# Altium PCB blm_ctrl.PcbDoc
Units mm, origin at the board's own origin, x right, y up, seen from the top; angles counter-clockwise.
Board outline 62 x 18 mm, 2 copper layers (Top Layer, Bottom Layer); 99 components, 64 nets, 249 pads, 43 vias.
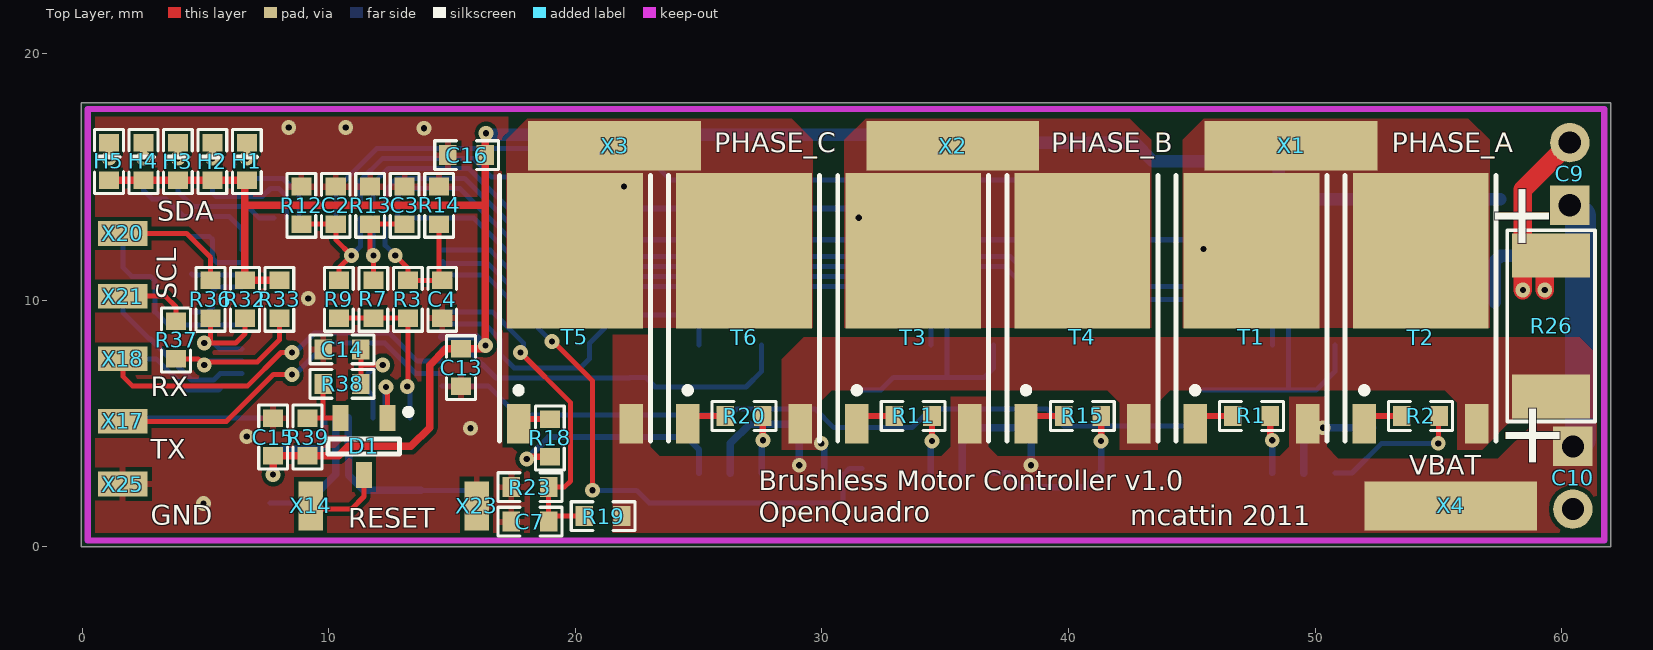
[diagram p0: Top Layer view]
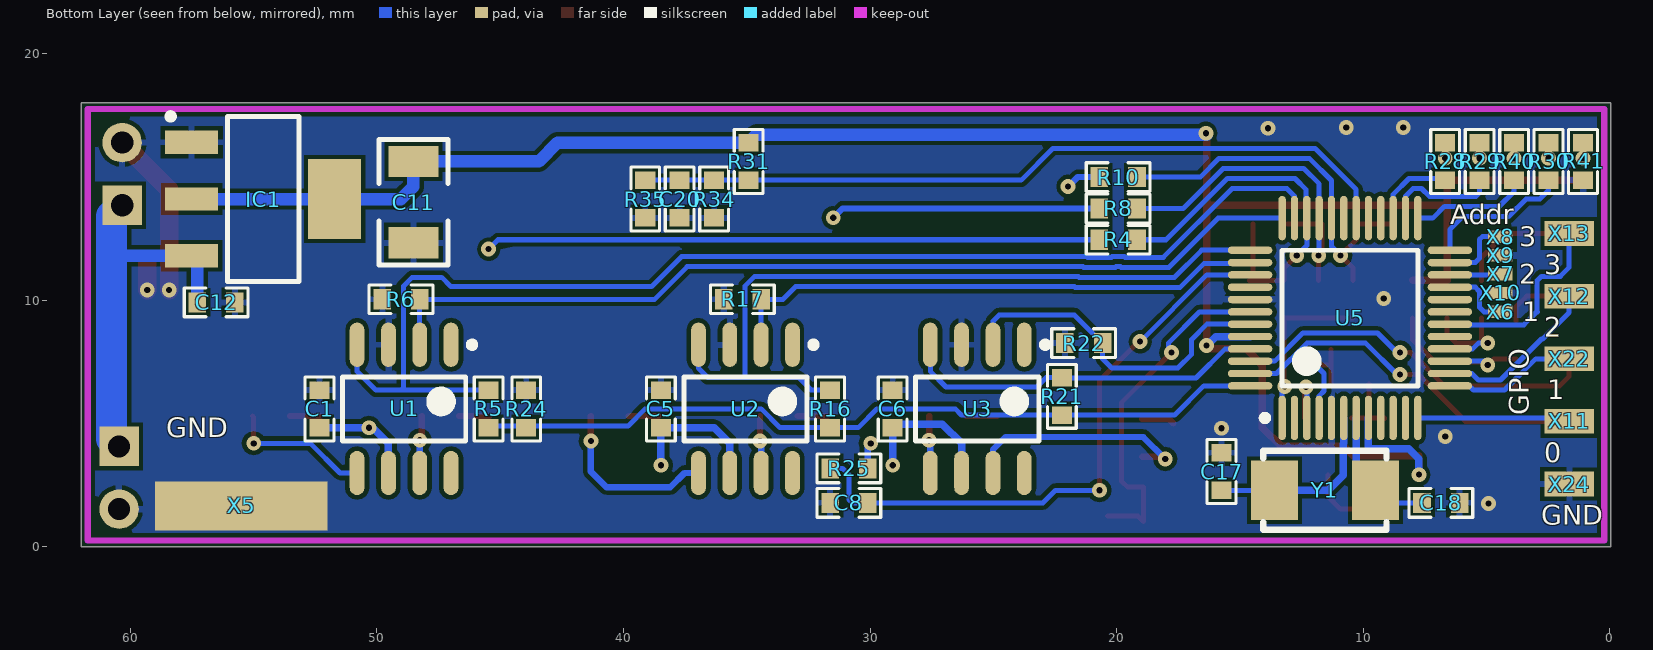
[diagram p1: Bottom Layer view, seen from below]

## Layer stack, top to bottom
Top Layer: signal copper 0.0356
Dielectric: dielectric 0.32, FR-4, Dk 4.8
Bottom Layer: signal copper 0.0356

## Board outline
-0.024,0 61.976,0 61.976,18 -0.024,18

## Design rules (kind name [scope] priority, off if disabled: settings)
Clearance [All] p1: gap=0.178
MinimumSolderMaskSliver [All] p1: minsoldermaskwidth=0.1
PolygonConnect PolygonConnect_1 [(InNet('PHASE_A') OR InNet('PHASE_B') OR InNet('PHASE_C')  OR InNet('NetR25_1') OR InNet('VBAT')) vs (InNet('PHASE_A') OR InNet('PHASE_B') OR InNet('PHASE_C')  OR InNet('NetR25_1') OR InNet('VBAT'))] p1: connectstyle=Direct reliefconductorwidth=0.254 reliefentries=4 polygonreliefangle="90 Angle"
PolygonConnect PolygonConnect_2 [InNet('GND') vs (IsVia OR InComponent('X5'))] p2: connectstyle=Direct reliefconductorwidth=0.254 reliefentries=4 polygonreliefangle="90 Angle"
PolygonConnect PolygonConnect_3 [(InNet('VBAT')) vs (InComponent('X1'))] p3: connectstyle=Direct reliefconductorwidth=0.254 reliefentries=4 polygonreliefangle="90 Angle"
PolygonConnect [All] p4: connectstyle=Relief reliefconductorwidth=0.254 reliefentries=4 polygonreliefangle="90 Angle"
RoomDefinition blm_ctrl_cortex [InComponentClass('blm_ctrl_cortex')] p1: confinementstyle=ConfineIn formatcopy=TRUE lockcomponents=FALSE outline -6.35,-5.512 67.361,-5.512 67.361,24.105 -6.35,24.105
RoomDefinition blm_ctrl_power [InComponentClass('blm_ctrl_power')] p2: confinementstyle=ConfineIn formatcopy=TRUE lockcomponents=FALSE outline -6.807,-5.918 66.7,-5.918 66.7,24.13 -6.807,24.13
RoutingVias [All] p1: holewidth=0.25 width=0.6 viastyle="Through Hole" minholewidth=0.25 minwidth=0.6 maxholewidth=0.711 maxwidth=1.27
SilkToSilkClearance [All] p1 off: silktosilkclearance=0.254
SilkscreenOverComponentPads [All] p1: minsilkscreentomaskgap=0.1
SolderMaskExpansion [All] p1: expansion=0.102
TestPointUsage [All] p1: valid=0 allowmultiple=FALSE
Testpoint [All] p1: side=15 testpointundercomponent=TRUE minsize=1.016 maxsize=2.54 preferedsize=1.524 minholesize=0 maxholesize=1.016 preferedholesize=0.813 testpointgrid=0.025 style=1023 order=0123456789
Width [All] p1: maxlimit=5.08 minlimit=0.15 preferedwidth=0.203
21 further rules are at their usual default settings.

## Classes and differential pairs
component class blm_ctrl_cortex: C14 C15 C16 C17 C18 C20 D1 H1 H2 H3 H4 H5 P1 R27 R28 R29 R30 R31 R32 R33 R34 R35 R36 R37 R38 R39 R40 R41 U5 X6 X7 X8 X9 X10 X11 X12 X13 X14 X17 X18 X19 X20 X21 X22 X23 X24 X25 Y1
component class blm_ctrl_power: C1 C2 C3 C4 C5 C6 C7 C8 C9 C10 C11 C12 C13 IC1 R1 R2 R3 R4 R5 R6 R7 R8 R9 R10 R11 R12 R13 R14 R15 R16 R17 R18 R19 R20 R21 R22 R23 R24 R25 R26 T1 T2 T3 T4 T5 T6 U1 U2 U3 X1 X2 X3 X4 X5

## Components (designator, comment, footprint, x,y, rotation, side; value= is the part's Value field where it differs from the comment)
C1 "Cap" 0603 52.324,4.826 r180 bottom
C2 "Cap" 0603 10.287,13.081 r0 top
C3 "Cap" 0603 13.081,13.081 r0 top
C4 "Cap" 0603 14.605,10.795 r180 top
C5 "Cap" 0603 38.481,4.826 r180 bottom
C6 "Cap" 0603 29.083,4.826 r180 bottom
C7 "Cap" 0603 18.923,1.016 r90 top
C8 "Cap" 0603 30.099,1.778 r90 bottom
C9 "Cap Pol2" C00101 60.325,16.383 r270 top
C10 "Cap Pol2" C00101 60.452,1.524 r90 top
C11 "Cap Pol2" 1206 48.514,15.621 r270 bottom
C12 "Cap" 0603 57.277,9.906 r270 bottom
C13 "Cap" 0603 15.367,8.021 r180 top
C14 "Cap" 0603 11.303,8.001 r90 top
C15 "Cap" 0603 7.747,3.683 r0 top
C16 "Cap" 0603 16.357,15.875 r90 top
C17 "Cap" 0603 15.748,3.81 r0 bottom
C18 "Cap" 0603 6.096,1.778 r90 bottom
C20 "Cap" 0603 37.719,14.859 r0 bottom
D1 "BAT54C" SOT95P240X130-3N 11.43,4.064 r270 top
H1 "Led" 0603_LED 6.68,14.859 r0 top
H2 "Led" 0603_LED 5.283,14.859 r0 top
H3 "Led" 0603_LED 3.886,14.859 r0 top
H4 "Led" 0603_LED 2.489,14.859 r0 top
H5 "Led" 0603_LED 1.092,14.859 r0 top
IC1 "LT1117CST-5#PBF" SOT230P700X180-4N 54.61,14.097 r180 bottom
R1 "Res1" 0603 46.655,5.3 r270 top
R2 "Res1" 0603 53.513,5.3 r270 top
R3 "Res1" 0603 13.208,9.271 r0 top
R4 "Res1" 0603 19.177,12.446 r90 bottom
R5 "Res1" 0603 45.466,6.35 r0 bottom
R6 "Res1" 0603 48.26,10.033 r90 bottom
R7 "Res1" 0603 11.811,9.271 r0 top
R8 "Res1" 0603 19.177,13.716 r90 bottom
R9 "Res1" 0603 10.414,9.271 r0 top
R10 "Res1" 0603 19.177,14.986 r90 bottom
R11 "Res1" 0603 32.939,5.3 r270 top
R12 "Res1" 0603 8.89,13.081 r0 top
R13 "Res1" 0603 11.684,13.081 r0 top
R14 "Res1" 0603 14.478,13.081 r0 top
R15 "Res1" 0603 39.797,5.3 r270 top
R16 "Res1" 0603 31.623,6.35 r0 bottom
R17 "Res1" 0603 34.417,10.033 r90 bottom
R18 "Res1" 0603 18.969,5.173 r180 top
R19 "Res1" 0603 21.89,1.236 r90 top
R20 "Res1" 0603 26.081,5.3 r270 top
R21 "Res1" 0603 22.225,6.858 r0 bottom
R22 "Res1" 0603 20.574,8.255 r90 bottom
R23 "Res1" 0603 18.923,2.413 r90 top
R24 "Res1" 0603 43.942,4.826 r180 bottom
R25 "Res1" 0603 30.099,3.175 r90 bottom
R26 "Res1" 2512 59.563,6.096 r90 top
R28 "Res1" 0603 6.68,16.383 r0 bottom
R29 "Res1" 0603 5.283,16.383 r0 bottom
R30 "Res1" 0603 2.489,16.383 r0 bottom
R31 "Res1" 0603 34.925,16.383 r0 bottom
R32 "Res1" 0603 6.604,10.795 r180 top
R33 "Res1" 0603 8.001,10.795 r180 top
R34 "Res1" 0603 36.322,14.859 r0 bottom
R35 "NTC" 0603 39.116,14.859 r0 bottom
R36 "Res1" 0603 5.207,9.271 r0 top
R37 "Res1" 0603 3.81,7.62 r0 top
R38 "Res1" 0603 11.303,6.604 r90 top
R39 "Res1" 0603 9.144,5.207 r180 top
R40 "Res1" 0603 3.886,16.383 r0 bottom
R41 "Res1" 0603 1.092,16.383 r0 bottom
T1 "SQD45P03-12-GE3" TO-252AA 47.417,8.494 r0 top locked
T2 "IRLR7843PBF" TO-252AA 54.275,8.494 r0 top locked
T3 "SQD45P03-12-GE3" TO-252AA 33.701,8.494 r0 top locked
T4 "IRLR7843PBF" TO-252AA 40.559,8.494 r0 top locked
T5 "SQD45P03-12-GE3" TO-252AA 19.985,8.494 r0 top locked
T6 "IRLR7843PBF" TO-252AA 26.843,8.494 r0 top locked
U1 "TC4428A" SOIC127P600-8BN 48.895,5.588 r270 bottom
U2 "TC4428A" SOIC127P600-8BN 35.052,5.588 r270 bottom
U3 "TC4428A" SOIC127P600-8BN 25.654,5.588 r270 bottom
U5 "LPC1342/43-LQFP48" TSQFP50P900X900-48N 10.541,9.271 r90 bottom locked
X1 "" PAD_SMD_2x7MM#1 49.022,16.256 r90 top
X2 "" PAD_SMD_2x7MM#1 35.306,16.256 r90 top
X3 "" PAD_SMD_2x7MM#1 21.59,16.256 r90 top
X4 "" PAD_SMD_2x7MM#1 55.499,1.651 r90 top
X5 "" PAD_SMD_2x7MM#2 55.499,1.651 r90 top
X6 "" PAD_SMD_0.5x1MM 4.445,9.525 r270 bottom
X7 "" PAD_SMD_0.5x1MM 4.445,11.049 r270 bottom
X8 "" PAD_SMD_0.5x1MM 4.445,12.573 r90 bottom
X9 "" PAD_SMD_0.5x1MM 4.445,11.811 r90 bottom
X10 "" PAD_SMD_0.5x1MM 4.445,10.287 r270 bottom
X11 "" PAD_SMD_1x2MM 1.651,5.08 r90 bottom
X12 "" PAD_SMD_1x2MM 1.651,10.16 r90 bottom
X13 "" PAD_SMD_1x2MM 1.651,12.7 r90 bottom
X14 "" PAD_SMD_1x2MM 9.271,1.651 r180 top
X17 "" PAD_SMD_1x2MM 1.651,5.08 r270 top
X18 "" PAD_SMD_1x2MM 1.651,7.62 r270 top
X20 "" PAD_SMD_1x2MM 1.651,12.7 r90 top
X21 "" PAD_SMD_1x2MM 1.651,10.16 r90 top
X22 "" PAD_SMD_1x2MM 1.651,7.62 r270 bottom
X23 "" PAD_SMD_1x2MM 16.002,1.651 r0 top
X24 "" PAD_SMD_1x2MM 1.651,2.54 r270 bottom
X25 "" PAD_SMD_1x2MM 1.651,2.54 r90 top
Y1 "12MHz" QUARTZ_SMD_CX5032 11.557,2.286 r0 bottom

## Footprints (in the part's own frame and the unit in brackets; to place one, negate y for a bottom-side part, rotate by r counter-clockwise, add the part's x,y. Pads: shape width x height; smd on the part's side, far side on the other; paste and mask are expansions set on the pad)
0603 [mil]
  rect 32x28 smd: 1(0,0) 2(0,60)
  silkscreen extent -23,-21 23,81
0603_LED [mil]
  rect 32.01x27.99 smd: 1(0,0) 2(0,60)
  silkscreen extent -23,-21 23,81
1206 [mil]
  rect 50x80 smd: 1(0,0) 2(130,0)
  silkscreen extent -35,-55 165,55
2512 [mil]
  rect 70x125 smd: 1(0,0) 2(225,0)
  silkscreen extent -40,-70 265,70
C00101 [mm]
  rect 1.6x1.6 hole 0.9: 1(2.54,0)
  round 1.6 hole 0.9: 2(0,0)
PAD_SMD_0.5x1MM [mm]
  rect 0.5x1 smd: 1(0,0)
PAD_SMD_1x2MM [mm]
  rect 1x2 smd: 1(0,0)
PAD_SMD_2x7MM#1 [mm]
  rect 2x7 smd: 1(0,0)
PAD_SMD_2x7MM#2 [mm]
  rect 2x7 smd far side: 1(0,0)
QUARTZ_SMD_CX5032 [mm]
  rect 1.9x2.4 smd: 1(-2.05,0) 2(2.05,0)
  silkscreen extent -2.5,-1.6 2.5,1.6
SOIC127P600-8BN [mm] "SOIC, 8-Leads, Body 4.9x3.9mm, Pitch 1.27mm, IPC Medium Density"
  oval 1.8x0.6 smd: 1(-2.6,1.905) 2(-2.6,0.635) 3(-2.6,-0.635) 4(-2.6,-1.905) 5(2.6,-1.905) 6(2.6,-0.635) 7(2.6,0.635) 8(2.6,1.905)
  silkscreen extent -2.72,-2.5 1.3,2.88, body extent -2,-2.5 2,2.5, height 2.59
SOT95P240X130-3N [mm] "SOT23 3-Leads, Pitch 0.95mm - Body 1.3x2.9mm, IPC Medium Density"
  rect 1.05x0.65 smd: 1(-1.15,0.95) 2(-1.15,-0.95) 3(1.15,0)
  silkscreen extent -1.52,-1.45 0.3,1.92, body extent -1.25,-1.5 1.25,1.5, height 1.3
SOT230P700X180-4N [mm] "SOT223, 2.30mm pitch; 3 pin, 3.70mm W X 6.70mm L, IPC Medium Density"
  rect 2.15x0.95 smd: 1(-2.9,2.3) 2(-2.9,0) 3(-2.9,-2.3)
  rect 2.15x3.25 smd: 4(2.9,0)
  silkscreen extent -3.88,-3.35 1.45,3.47, body extent -3.65,-3.35 3.65,3.35, height 1.81
TO-252AA [mm] "D-PAK/TO-252-AA; 3 Leads (1 Cropped); Body 10.2 (inc. leads) x 6.7 mm (LxW max)"
  rect 0.95x1.6 smd: 1(-2.285,-3.5) 3(2.285,-3.5)
  rect 5.5x6.3 smd: 4(0,3.5)
  silkscreen extent -3.06,-4.2 3.06,6.55
TSQFP50P900X900-48N [mm] "Thin QFP, 48-Leads, Body 7x7mm, Pitch 0.5mm, IPC Medium Density"
  oval 1.8x0.3 smd: 1(-4.05,2.75) 2(-4.05,2.25) 3(-4.05,1.75) 4(-4.05,1.25) 5(-4.05,0.75) 6(-4.05,0.25) 7(-4.05,-0.25) 8(-4.05,-0.75) 9(-4.05,-1.25) 10(-4.05,-1.75) 11(-4.05,-2.25) 12(-4.05,-2.75) 25(4.05,-2.75) 26(4.05,-2.25) 27(4.05,-1.75) 28(4.05,-1.25) 29(4.05,-0.75) 30(4.05,-0.25) 31(4.05,0.25) 32(4.05,0.75) 33(4.05,1.25) 34(4.05,1.75) 35(4.05,2.25) 36(4.05,2.75)
  oval 0.3x1.8 smd: 13(-2.75,-4.05) 14(-2.25,-4.05) 15(-1.75,-4.05) 16(-1.25,-4.05) 17(-0.75,-4.05) 18(-0.25,-4.05) 19(0.25,-4.05) 20(0.75,-4.05) 21(1.25,-4.05) 22(1.75,-4.05) 23(2.25,-4.05) 24(2.75,-4.05) 37(2.75,4.05) 38(2.25,4.05) 39(1.75,4.05) 40(1.25,4.05) 41(0.75,4.05) 42(0.25,4.05) 43(-0.25,4.05) 44(-0.75,4.05) 45(-1.25,4.05) 46(-1.75,4.05) 47(-2.25,4.05) 48(-2.75,4.05)
  silkscreen extent -4.17,-2.75 2.75,3.58, body extent -3.5,-3.5 3.5,3.5, height 1.6

## Part data
C1 C2 C3 C4 C5 C6 C7 C8 C12 C13 C14 C15 C16 C17 C18 C20: "Capacitor"
C9 C10 C11: "Polarized Capacitor (Axial)"
D1: "Dual Common Cathode Schottky Diodes"
H1 H2 H3 H4 H5: "Led low current"
IC1: library part LT1117IST-5#PBF, "3-Terminal Regulator 1=GND 2=OUT 3=IN 4=OUT"
R1 R2 R3 R4 R5 R6 R7 R8 R9 R10 R11 R12 R13 R14 R15 R16 R17 R18 R19 R20 R21 R22 R23 R24 R25 R26 R28 R29 R30 R31 R32 R33 R34 R36 R37 R38 R39 R40 R41: "Resistor"
R35: "Temperature dependent resistor"
T1 T3 T5: library part BSH203, "P-CHANNEL MOSFET WITH DIODE"
T2 T4 T6: library part BSS123, "N-CHANNEL MOSFET WITH DIODE"
U5: library part ATmega8-16AC, "8-Bit AVR Microcontroller with 8K Bytes of In-System Programmable Flash Memory"
X1 X2 X3 X4 X5 X6 X7 X8 X9 X10 X11 X12 X13 X14 X17 X18 X20 X21 X22 X23 X24 X25: library part TEST_POINT
Y1: library part XTAL, "Crystal Oscillator"

## Via types
v1: diameter 0.6, hole 0.25, Top Layer to Bottom Layer, tented both sides, 43 vias

## Nets (pads, with @x,y where several pads share a name; then routed paths per layer and width w, separated by ;. In a path a pad name is that pad's centre, name@x,y a point inside that pad or via, vN(x,y) a via of type N, cw(c..) or ccw(c..) an arc to the next point about the centre after c; other vN are vias at no path point)
ADR1: U5.21 X6.1 | length 2.8
  Bottom Layer w0.203: X6.1 5.105,9.525 5.286,9.706 5.286,10.346 5.461,10.521 U5.21
ADR2: U5.22 X7.1 | length 2.1
  Bottom Layer w0.203: X7.1 4.473,11.021 U5.22
ADR3: U5.23 X8.1 | length 2.9
  Bottom Layer w0.203: X8.1 5.177,12.573 5.286,12.463 5.286,11.696 5.461,11.521 U5.23
CTRL_H_A: R6.1 U1.2 U5.36 | length 38.2
  Bottom Layer w0.203: U5.36 15.889,13.321 17.882,11.328 19.827,11.328 19.853,11.354 20.025,11.354 20.051,11.328 21.351,11.328 21.377,11.354 37.414,11.354 38.735,10.033 R6.1 U1.2
CTRL_H_B: R17.1 U2.2 U5.38 | length 22.6
  Bottom Layer w0.203: U5.38@14.636,11.566 U5.38 14.636,11.476 16.464,11.476 17.424,10.516 21.688,10.516 21.713,10.541 33.02,10.541 33.528,10.033 R17.1 U2.2 U2.2@34.417,8.373
CTRL_H_C: R22.1 U3.2 U5.43 | length 13.8
  Bottom Layer w0.203: U5.43 16.345,9.021 16.962,8.404 16.962,7.803 17.521,7.244 20.198,7.244 20.574,7.62 R22.1 21.717,9.398 24.765,9.398 25.019,9.144 U3.2
CTRL_L_A: R5.1 U1.4 U5.35 | length 50.1
  Bottom Layer w0.203: U5.35 12.791,14.214 13.103,14.526 15.319,14.526 18.11,11.735 19.659,11.735 19.684,11.76 20.194,11.76 20.219,11.735 21.183,11.735 21.208,11.76 37.643,11.76 38.862,10.541 46.99,10.541 47.371,10.922 48.564,10.922 48.92,10.566 48.92,10.419 48.925,10.414 48.925,6.447 49.022,6.35 ; R5.1 49.022,6.35 ; U1.4 50.8,7.112 50.038,6.35 49.022,6.35
CTRL_L_B: R16.1 U2.4 U5.37 | length 31.5
  Bottom Layer w0.203: U5.37 16.554,12.021 17.653,10.922 21.52,10.922 21.545,10.947 34.696,10.947 35.077,10.566 35.077,6.858 ; R16.1 32.385,6.35 32.893,6.858 35.077,6.858 ; U2.4 36.957,7.239 36.576,6.858 35.077,6.858
CTRL_L_C: R21.1 U3.4 U5.45 | length 15
  Bottom Layer w0.203: U5.45 15.601,8.021 16.785,6.837 22.204,6.837 R21.1 22.86,6.858 23.241,6.477 26.924,6.477 27.559,7.112 U3.4
CTRL_L_COM: R5.2 R16.2 R21.2 R24.1 U5.48 | length 32.4
  Bottom Layer w0.203: U5.48 16.466,6.521 17.653,5.334 R21.2 26.289,5.334 26.543,5.588 29.718,5.588 30.48,4.826 R16.2 33.655,4.826 34.417,5.588 39.116,5.588 39.815,4.889 45.403,4.889 R5.2
GND: C1.2 C2.2 C3.2 C4.2 C5.2 C6.2 C7.2 C8.2 C9.2 C10.2 C11.2 C12.2 C13.2 C14.2 C15.2 C16.2 C17.1 C18.1 C20.2 IC1.1 R6.2 R12.2 R13.2 R14.2 R17.2 R22.2 R23.2 R24.2 R26.2 R34.2 R35.2 R41.2 U1.3 U2.3 U3.3 U5.5 U5.41 X5.1 X9.1 X10.1 X23.1 X24.1 X25.1 | length 7.9
  Top Layer w0.762: v1(58.42,10.414) 58.42,14.478 C9.2 ; v1(59.309,10.414) R26.2@59.309,11.557
  other v1: 4.928,1.753 6.68,4.47 15.748,4.801 9.169,10.058 13.868,16.967 8.382,16.993 10.693,16.993
GPIO_0: U5.12 X11.1 | length 6.2
  Bottom Layer w0.203: X11.1 1.792,5.221 U5.12
GPIO_1: U5.13 X22.1 | length 5.4
  Bottom Layer w0.203: X22.1 3.007,7.62 4.273,6.355 5.533,6.355 5.699,6.521 U5.13
GPIO_2: U5.14 X12.1 | length 6.7
  Bottom Layer w0.203: X12.1 1.651,9.5 2.726,8.425 2.777,8.425 4.441,6.761 5.338,6.761 5.598,7.021 U5.14
GPIO_3: U5.18 X13.1 | length 7.9
  Bottom Layer w0.203: X13.1 1.651,11.328 2.015,10.965 2.777,10.965 2.956,10.786 2.956,9.534 ; 2.946,9.524 2.956,9.534 ; U5.18 6.466,8.996 3.494,8.996 2.956,9.534
IMOT_MEAS: C8.1 R25.2 U5.39 | length 24.6
  Top Layer w0.203: v1(19.05,8.315) 19.117,8.315 20.701,6.731 v1(20.701,2.286)
  Bottom Layer w0.203: U5.39 16.344,11.021 v1(19.05,8.315) ; v1(20.701,2.286) 22.479,2.286 22.987,1.778 C8.1 30.734,1.778 30.861,1.905 30.861,2.921 31.115,3.175 R25.2
ISP: C14.1 R38.1 U5.4 | length 4.9
  Top Layer w0.203: R38.1 11.303,7.366 ; C14.1 11.303,7.366 ; v1(12.192,7.366) 11.303,7.366
  Bottom Layer w0.203: U5.4 11.791,6.114 11.593,6.312 11.593,7.021 11.938,7.366 v1(12.192,7.366)
LED_0: R28.2 U5.27 | length 3.4
  Bottom Layer w0.203: R28.2 6.753,14.932 8.148,14.932 8.791,14.289 U5.27
LED_1: R29.2 U5.26 | length 4.7
  Bottom Layer w0.203: R29.2 5.283,14.351 5.436,14.199 7.311,14.199 7.639,14.526 7.979,14.526 8.291,14.214 U5.26
LED_2: R40.2 U5.25 | length 4.8
  Bottom Layer w0.203: R40.2 3.886,14.402 4.496,13.792 6.717,13.792 7.188,13.321 U5.25
LED_3: R30.2 U5.24 | length 5.9
  Bottom Layer w0.203: R30.2 2.489,14.453 2.841,14.101 3.399,14.101 4.115,13.386 5.969,13.386 6.491,12.864 U5.24
MIDDLE: R3.1 R7.1 R9.1 U5.1 | length 6.9
  Top Layer w0.203: R9.1 R7.1 R3.1 13.208,6.518 v1(13.188,6.498)
  Bottom Layer w0.203: v1(13.188,6.498) 13.188,6.457 13.291,6.354 U5.1
NetC17_2: C17.2 U5.6 Y1.2 | length 7.5
  Bottom Layer w0.203: Y1.2@13.734,2.286 C17.2
  Bottom Layer w0.305: 10.791,4.195 U5.6 ; 10.799,4.195 10.813,4.181 10.813,2.903 11.43,2.286 Y1.2 Y1.2@13.734,2.286
NetC18_2: C18.2 U5.7 Y1.1 | length 5.4
  Bottom Layer w0.203: C18.2 9.126,1.778 Y1.1@9.634,2.286
  Bottom Layer w0.305: Y1.1@9.634,2.286 10.291,2.943 U5.7
NetD1_2: D1.2 R38.2 R39.1 | length 2.7
  Top Layer w0.203: R39.1 9.151,5.214 9.779,5.214 ; R38.2 9.779,5.214 ; D1.2 9.779,5.214
NetD1_3: D1.3 X14.1 | length 3.3
  Top Layer w0.203: X14.1@9.271,1.524 10.922,1.524 11.43,2.032 D1.3
NetH1_2: H1.2 R28.1 | length 1.3
  Top Layer w0.203: v1(6.68,15.748) H1.2
  Bottom Layer w0.203: v1(6.68,15.748) R28.1
NetH2_2: H2.2 R29.1 | length 1.3
  Top Layer w0.203: v1(5.283,15.748) H2.2
  Bottom Layer w0.203: v1(5.283,15.748) R29.1
NetH3_2: H3.2 R40.1 | length 1.3
  Top Layer w0.203: v1(3.886,15.748) H3.2
  Bottom Layer w0.203: v1(3.886,15.748) R40.1
NetH4_2: H4.2 R30.1 | length 1.3
  Top Layer w0.203: v1(2.489,15.748) H4.2
  Bottom Layer w0.203: v1(2.489,15.748) R30.1
NetH5_2: H5.2 R41.1 | length 1.3
  Top Layer w0.203: v1(1.092,15.748) H5.2
  Bottom Layer w0.203: v1(1.092,15.748) R41.1
NetR1_1: R1.1 T1.1 | length 1.2
  Top Layer w0.254: T1.1@45.438,5.3 R1.1
NetR1_2: R1.2 U1.7 | length 2.3
  Top Layer w0.254: R1.2 48.179,4.399 v1(48.26,4.318)
  Bottom Layer w0.254: U1.7 v1(48.26,4.318)
NetR2_1: R2.1 T2.1 | length 1.2
  Top Layer w0.254: T2.1@52.296,5.3 R2.1
NetR2_2: R2.2 U1.5 | length 5.9
  Top Layer w0.203: v1(54.991,4.191) 54.991,5.254 R2.2
  Bottom Layer w0.203: U1.5 51.495,2.988 52.698,4.191 v1(54.991,4.191) v1@54.91,4.272
NetR11_1: R11.1 T3.1 | length 1.2
  Top Layer w0.254: T3.1@31.722,5.3 R11.1
NetR11_2: R11.2 U2.7 | length 2.3
  Top Layer w0.254: v1(34.463,4.284) R11.2
  Bottom Layer w0.254: U2.7 34.417,4.238 v1(34.463,4.284)
NetR15_1: R15.1 T4.1 | length 1.2
  Top Layer w0.254: T4.1@38.58,5.3 R15.1
NetR15_2: R15.2 U2.5 | length 7.1
  Top Layer w0.254: v1(41.321,4.284) R15.2
  Bottom Layer w0.254: U2.5 37.525,2.988 38.1,2.413 40.686,2.413 41.321,3.048 v1(41.321,4.284)
NetR18_1: R18.1 T5.1 | length 1.3
  Top Layer w0.254: T5.1 17.879,5.173 R18.1
NetR18_2: R18.2 U3.7 | length 9.5
  Top Layer w0.254: v1(18.034,3.556) 18.127,3.649 R18.2
  Bottom Layer w0.254: v1(18.034,3.556) 18.923,4.445 24.511,4.445 25.019,3.937 U3.7
NetR20_1: R20.1 T6.1 | length 1.2
  Top Layer w0.254: T6.1@24.864,5.3 R20.1
NetR20_2: R20.2 U3.5 | length 2.3
  Top Layer w0.254: v1(27.605,4.318) R20.2
  Bottom Layer w0.254: U3.5 27.559,4.272 v1(27.605,4.318)
NetR25_1: R25.1 R26.1 T2.3 T4.3 T6.3 | length 1.1
  Bottom Layer w0.254: v1(29.972,4.191) 30.099,4.064 R25.1
NetR36_2: R36.2 X20.1 | length 4.9
  Top Layer w0.203: X20.1 4.242,12.7 5.207,11.735 R36.2
NetR37_2: R37.2 X21.1 | length 2.9
  Top Layer w0.203: X21.1 3.378,10.16 3.81,9.728 R37.2
NULL_A: C4.1 R3.2 R4.1 R14.1 U5.34 | length 15.6
  Top Layer w0.203: v1@12.573,11.938 12.573,11.811 v1(12.7,11.811) 13.208,11.303 R3.2 C4.1 ; C4.1@14.478,10.922 R14.1
  Bottom Layer w0.203: U5.34 12.291,12.22 v1(12.7,11.811) ; U5.34@12.291,13.702 12.319,13.73 12.319,14.478 12.773,14.932 15.514,14.932 18,12.446 R4.1
NULL_B: C3.1 R7.2 R8.1 R13.1 U5.33 | length 14.6
  Top Layer w0.203: R7.2 v1(11.811,11.811) 11.684,11.938 R13.1 C3.1
  Bottom Layer w0.203: U5.33 11.791,11.831 v1(11.811,11.811) ; U5.33@11.791,13.702 11.791,14.712 12.418,15.339 15.682,15.339 17.305,13.716 R8.1
NULL_C: C2.1 R9.2 R10.1 R12.1 U5.32 | length 15.7
  Top Layer w0.203: R12.1 C2.1 10.287,12.446 v1(10.922,11.811) ; R9.2 10.414,11.303 v1(10.922,11.811) ; v1@10.973,11.862 v1(10.922,11.811)
  Bottom Layer w0.203: v1(10.922,11.811) 11.291,12.18 U5.32 U5.32@11.246,13.276 ; U5.32@11.291,13.702 11.291,14.847 12.189,15.745 15.851,15.745 16.61,14.986 R10.1
P3V3: C11.1 C13.1 C15.1 C16.1 H1.1 H2.1 H3.1 H4.1 H5.1 IC1.2 IC1.4 R31.1 R32.1 R33.1 R39.2 U5.8 U5.44 | length 90.9
  Top Layer w0.305: H5.1 H4.1 H3.1 H2.1 H1.1 ; 6.604,13.843 16.357,13.843 ; H1.1@6.604,14.859 R32.1 R33.1 ; v1(7.747,2.921) C15.1 R39.2 9.779,3.683 10.414,3.683 10.795,4.064 13.335,4.064 14.097,4.826 14.097,7.366 14.752,8.021 C13.1 16.225,8.021 v1(16.357,8.154) 16.357,13.843 ; v1(16.383,16.764) 16.357,16.738 C16.1 16.357,13.843
  Bottom Layer w0.305: v1(7.747,2.921) 7.747,3.56 8.153,3.965 9.68,3.965 9.791,4.076 U5.8 ; U5.44 15.99,8.521 v1(16.357,8.154)
  Bottom Layer w0.508: v1@16.357,16.71 34.598,16.71 R31.1 42.672,16.383 43.434,15.621 C11.1 48.514,14.605 49.022,14.097 IC1.4 IC1.2
PHASE_A: R4.2 T1.4 T2.4 X1.1 | length 24.9
  Bottom Layer w0.203: R4.2 45.085,12.446 v1(45.466,12.065)
PHASE_B: R8.2 T3.4 T4.4 X2.1 | length 11
  Bottom Layer w0.254: R8.2 31.115,13.716 v1(31.496,13.335)
PHASE_C: R10.2 T5.4 T6.4 X3.1 | length 1.4
  Bottom Layer w0.254: R10.2 21.59,14.986 v1(21.971,14.605)
RESET: D1.1 U5.3 | length 2.6
  Top Layer w0.203: v1(12.319,6.477) 12.38,6.416 D1.1
  Bottom Layer w0.203: U5.3 12.291,6.449 v1(12.319,6.477)
RXD: U5.46 X18.1 | length 15.2
  Top Layer w0.203: X18.1 1.651,6.909 2.037,6.523 6.717,6.523 8.068,7.874 v1(8.509,7.874)
  Bottom Layer w0.203: v1(8.509,7.874) 8.636,7.874 9.423,8.661 12.454,8.661 13.595,7.521 U5.46
SCL: R33.2 R37.1 U5.15 | length 7.4
  Top Layer w0.203: R37.1 4.699,7.62 v1(4.953,7.366) 4.953,7.493 7.112,7.493 8.001,8.382 R33.2
  Bottom Layer w0.203: v1(4.953,7.366) 4.953,7.493 4.981,7.521 U5.15
SDA: R32.2 R36.1 U5.16 | length 5
  Top Layer w0.203: v1(4.953,8.255) 6.223,8.255 6.604,8.636 R32.2 ; v1@5.207,8.306 R36.1
  Bottom Layer w0.203: v1(4.953,8.255) 5.334,8.255 5.568,8.021 U5.16
SWCLK: U5.29
SWDIO: U5.40
SWO: U5.28
TEMP_MEAS: C20.1 R31.2 R34.1 R35.1 U5.30 | length 31.2
  Bottom Layer w0.203: U5.30 10.291,14.482 11.96,16.151 22.584,16.151 23.876,14.859 R31.2 R34.1 C20.1 R35.1
TXD: U5.47 X17.1 | length 14.8
  Top Layer w0.203: X17.1 5.848,5.08 7.753,6.985 v1(8.509,6.985)
  Bottom Layer w0.203: v1(8.509,6.985) 8.636,6.985 9.906,8.255 12.286,8.255 13.52,7.021 U5.47
VBAT: C1.1 C5.1 C6.1 C9.1 C10.1 C12.1 IC1.3 R19.1 T1.3 T3.3 T5.3 U1.6 U2.6 U3.6 X4.1 | length 31.3
  Bottom Layer w0.305: U3.6 26.289,4.191 27.072,4.974 28.935,4.974 C6.1 v1(29.083,3.302) ; U2.6 35.687,4.191 36.322,4.826 C5.1 v1(38.481,3.302) ; U1.6 49.53,4.191 50.165,4.826 C1.1
  Bottom Layer w0.508: C12.1 57.277,11.564 IC1.3 60.747,11.797
  Bottom Layer w1.27: C9.1 60.761,13.407 60.761,4.373 C10.1
  other v1: 50.317,4.826
VBAT_MEAS: C7.1 R19.2 R23.1 U5.42 | length 14.2
  Top Layer w0.203: v1(17.78,7.874) 19.812,5.842 19.812,2.667 19.558,2.413 R23.1 C7.1 19.143,1.236 R19.2
  Bottom Layer w0.203: U5.42 16.641,9.521 17.907,8.255 17.907,8.001 v1(17.78,7.874)
pads on no net: U1.1 U1.8 U2.1 U2.8 U3.1 U3.8 U5.2 U5.9 U5.10 U5.11 U5.17 U5.19 U5.20 U5.31

## Polygon pours and split planes (outlines as drawn)
GND on Top Layer "Bottom Layer-No Net" (solid, remove dead copper, pour order 1000): -1.274,17.75 17.272,17.75 17.272,4.191 18.161,3.302 18.161,3.175 18.161,0.25 -1.274,0.25 -1.274,17.75
PHASE_A on Top Layer "Bottom Layer-No Net" (solid, pour order 1002): 44.623,8.875 57.069,8.875 57.069,16.495 55.564,18 46.128,18 44.623,16.495
PHASE_B on Top Layer "Bottom Layer-No Net" (solid, pour order 1001): 30.907,8.875 43.353,8.875 43.353,16.495 41.848,18 32.412,18 30.907,16.495
PHASE_C on Top Layer "Bottom Layer-No Net" (solid, pour order 1000): 17.191,8.875 29.637,8.875 29.637,16.495 28.132,18 18.696,18 17.191,16.495
NetR25_1 on Top Layer "Bottom Layer-No Net" (solid, pour order 1000): 28.367,3.922 28.367,7.605 29.256,8.494 60.706,8.509 61.595,7.62 61.595,5.207 58.039,5.207 56.769,3.937 55.753,3.937 55.753,5.842 55.245,6.35 44.115,6.335 43.607,5.827 43.607,3.922 42.083,3.922 42.083,5.827 41.575,6.335 30.399,6.335 29.891,5.827 29.891,3.922
VBAT on Top Layer "Bottom Layer-No Net" (solid, pour order 1001): 21.509,8.602 23.033,8.602 23.033,4.049 23.414,3.668 34.844,3.668 35.225,4.049 35.225,6.081 36.749,6.081 36.749,4.049 37.13,3.668 48.56,3.668 48.941,4.049 48.941,6.081 50.465,6.081 50.465,4.049 50.927,3.556 57.404,3.556 59.309,5.461 61.726,5.461 61.726,0.255 21.509,0.25
GND on Bottom Layer "Bottom Layer-No Net" (solid, remove dead copper, pour order 1000): 61.726,17.75 61.726,0.25 0.226,0.25 0.226,17.75

## Keep-outs
Keep-Out Layer:
  lines w0.254: 0.226,0.25 0.226,17.75 61.726,17.75 61.726,0.25 0.226,0.25

## Silkscreen, mask and mechanical layers (free items; w line width, h text height)
Top Overlay:
  text "PHASE_C" at 25.629,16.002 h0.8
  text "PHASE_B" at 39.294,16.002 h0.8
  text "PHASE_A" at 53.111,16.002 h0.8
  text "SDA" at 3.048,13.208 h0.8
  text "SCL" at 3.81,10.033 h0.8 r90
  text "RX" at 2.794,6.096 h0.8
  text "TX" at 2.794,3.556 h0.8
  text "VBAT" at 53.823,2.921 h0.8
  text "Brushless Motor Controller v1.0" at 27.432,2.286 h0.8
  text "OpenQuadro" at 27.432,1.01 h0.8
  text "GND" at 2.794,0.889 h0.8
  text "mcattin 2011" at 42.494,0.876 h0.8
  text "RESET" at 10.795,0.762 h0.8
Bottom Overlay:
  text "Addr" at 6.477,13.081 h0.8
  text "3" at 3.683,12.192 h0.8
  text "3" at 2.667,11.049 h0.8
  text "2" at 3.683,10.668 h0.8
  text "1" at 3.556,9.144 h0.8
  text "2" at 2.667,8.509 h0.8
  text "1" at 2.534,5.969 h0.8
  text "GPIO" at 3.302,5.334 h0.8 r270
  text "GND" at 58.547,4.445 h0.8
  text "0" at 2.667,3.429 h0.8
  text "GND" at 2.794,0.889 h0.8
Mechanical 1:
  the board outline again, w0.254
Mechanical 2:
  the board outline again, w0.254

## Dimensions
-0.025,0 to -0.025,18 on Mechanical 1
-0.025,0 to 61.975,0 on Mechanical 1

## Text inside footprints (layer, text, board x,y; h text height)
C9: Top Overlay "+" at 57.302,14.859 h2.54 r270
C10: Top Overlay "+" at 59.919,3.048 h2.54 r90